# Altium PCB PCB1.pcbdoc
Units mil, origin at the board's own origin, x right, y up, seen from the top; angles counter-clockwise.
Board outline 3685 x 2685 mil, 2 copper layers (Top Layer, Bottom Layer), stack 62.2 mil thick; 26 components, 23 nets, 64 pads, 1 vias.
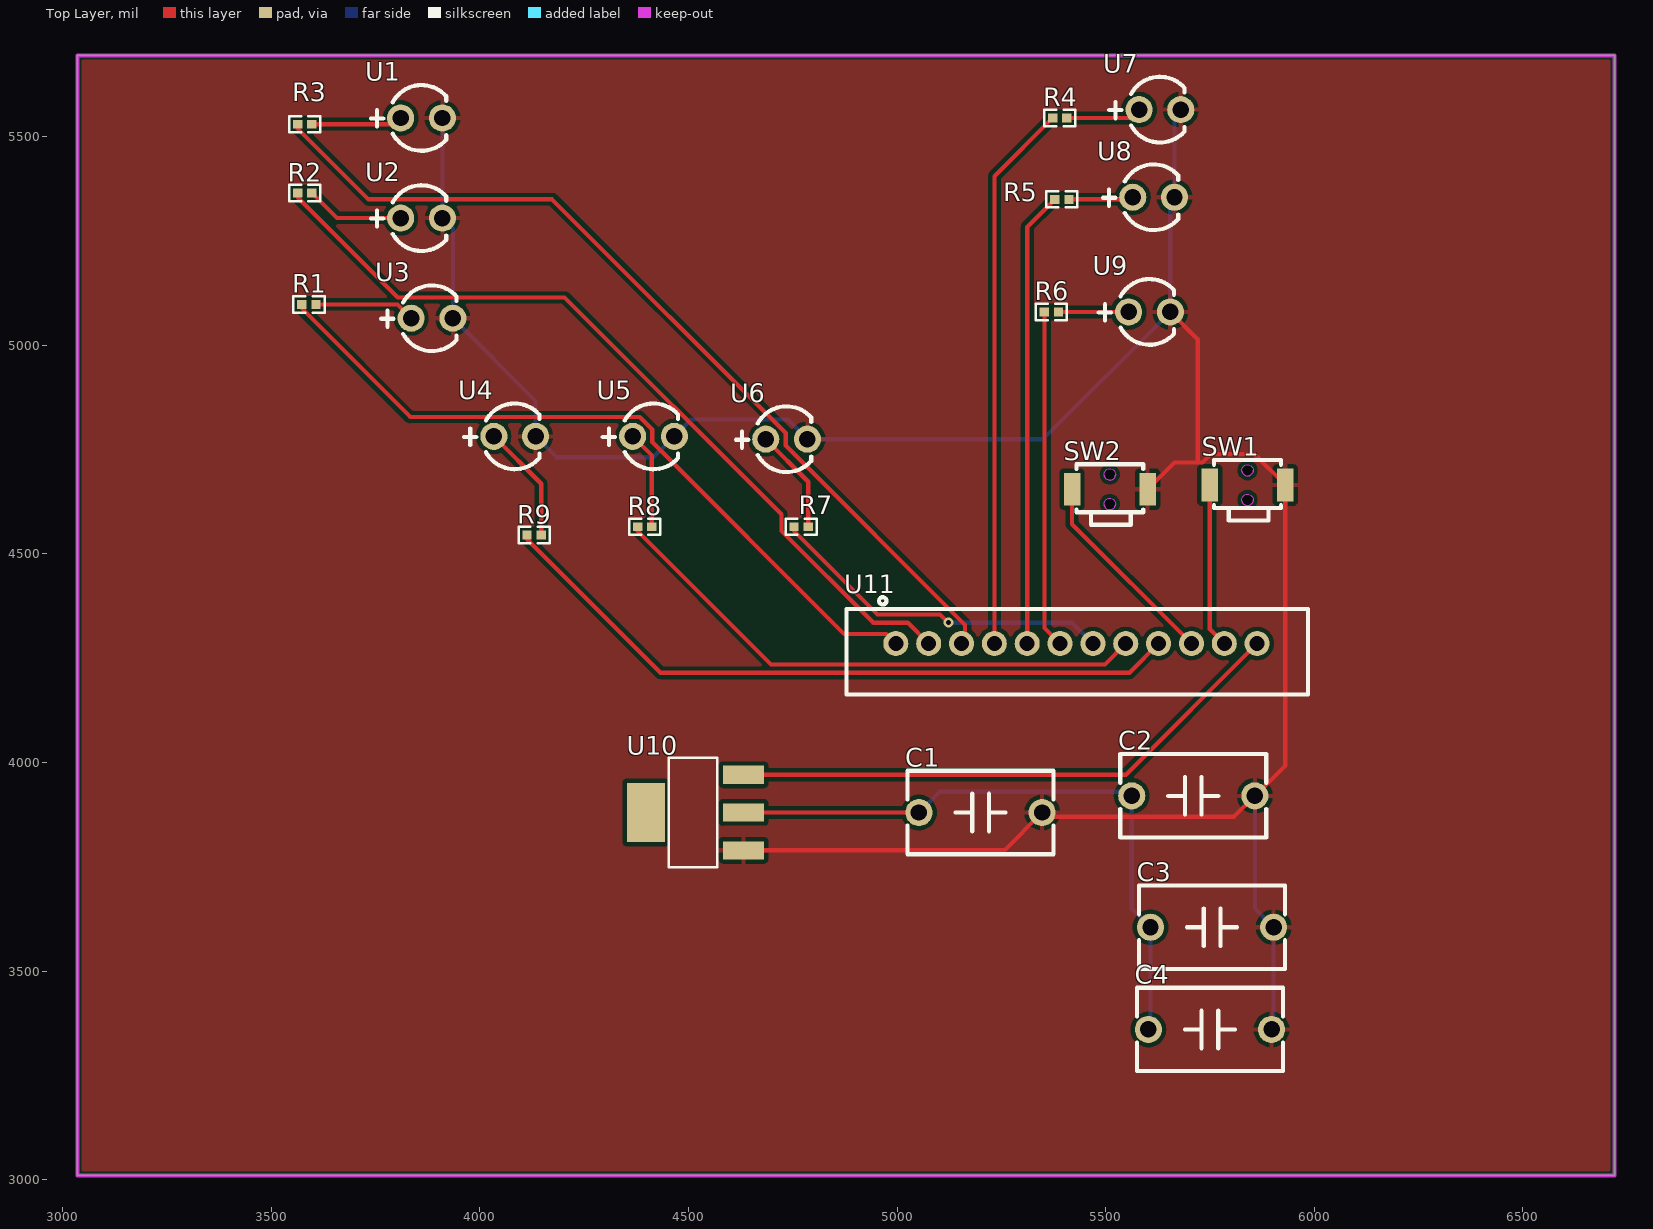
[diagram p0: Top Layer view]
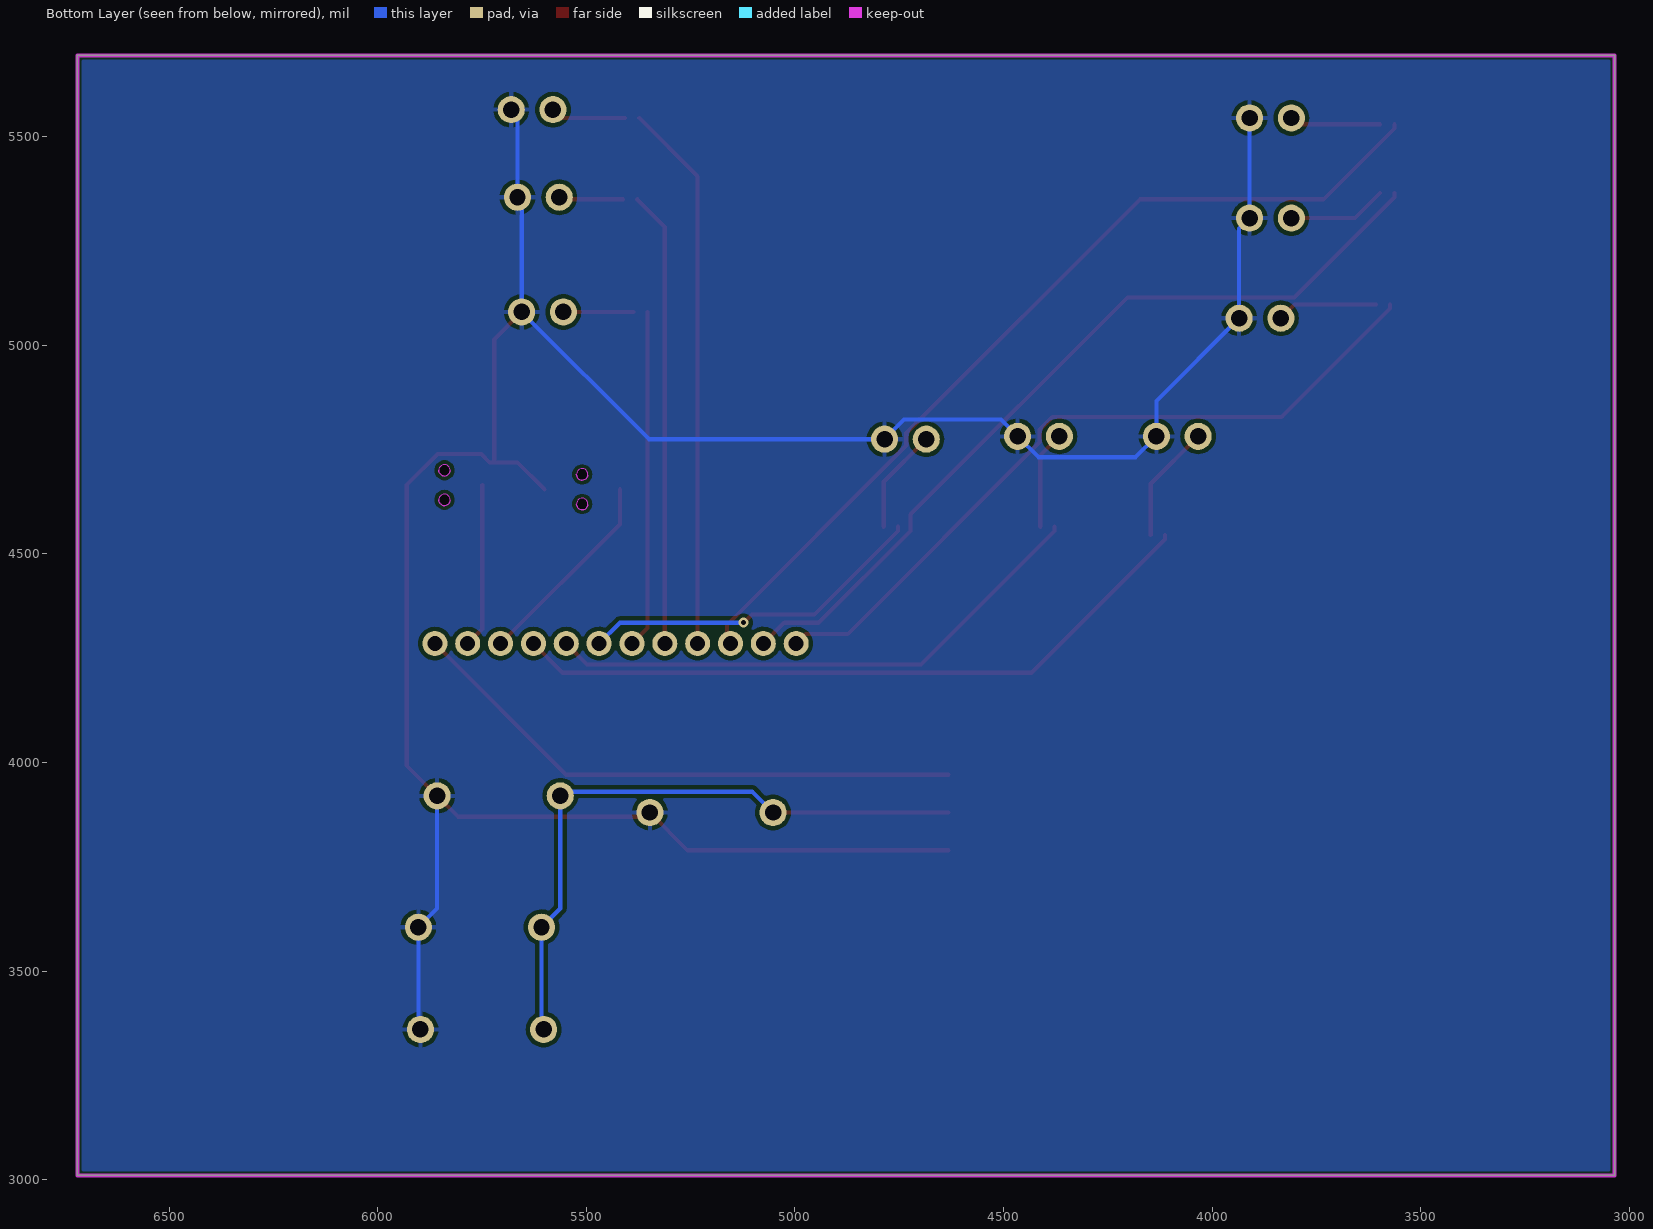
[diagram p1: Bottom Layer view, seen from below]

## Layer stack, top to bottom
Top Solder Mask Layer: solder mask 0.4, Dk 3.3
Top Layer: signal copper 1.4
Dielectric1: surface 59.4, FR4, Dk 4.5
Bottom Layer: signal copper 1.4
Bottom Solder Mask Layer: solder mask 0.4, Dk 3.3

## Board outline
3035,5695 3035,3010 6720,3010 6720,5695

## Design rules (kind name [scope] priority, off if disabled: settings)
BoardOutlineClearance copperThickness1oz_1 [All] p1: gap=10 ignorepadtopadclearanceinfootprint=FALSE except(0: Arc-SplitContinuation Track-SplitContinuation SMDPad-SplitContinuation THPad-SplitContinuation Via-SplitContinuation Fill-SplitContinuation Poly-SplitContinuation Region-SplitContinuation Text-SplitContinuation)
BoardOutlineClearance copperThickness2oz_1 [All] p2: gap=10 ignorepadtopadclearanceinfootprint=FALSE except(0: Arc-SplitContinuation Track-SplitContinuation SMDPad-SplitContinuation THPad-SplitContinuation Via-SplitContinuation Fill-SplitContinuation Poly-SplitContinuation Region-SplitContinuation Text-SplitContinuation)
BoardOutlineClearance otherClearance_1 [All] p3: gap=10 ignorepadtopadclearanceinfootprint=FALSE except(0: Arc-SplitContinuation Track-SplitContinuation SMDPad-SplitContinuation THPad-SplitContinuation Via-SplitContinuation Fill-SplitContinuation Poly-SplitContinuation Region-SplitContinuation Text-SplitContinuation)
Clearance copperThickness1oz [All] p1: gap=7 ignorepadtopadclearanceinfootprint=FALSE
Clearance copperThickness2oz [All] p2: gap=7 ignorepadtopadclearanceinfootprint=FALSE
Clearance otherClearance [All] p3: gap=7 ignorepadtopadclearanceinfootprint=FALSE
DiffPairsRouting differentialPair [All] p1: maxlimit=6 minlimit=6 mostfreqgap=6 toplayer_minwidth=5 toplayer_maxwidth=100 toplayer_prefwidth=10 bottomlayer_minwidth=5 bottomlayer_maxwidth=100 bottomlayer_prefwidth=10 maxuncoupledlength=10
PasteMaskExpansion pasteMaskExpansion [All] p1: expansion=0
PlaneConnect innerPlane [All] p1: planeconnectstyle=Relief reliefexpansion=20 reliefentries=4 reliefconductorwidth=10 reliefairgap=10
PolygonConnect copperRegion [All] p1: connectstyle=Relief reliefconductorwidth=10 reliefentries=4 polygonreliefangle="90 Angle" airgapwidth=10
RoutingVias viaSize [All] p1: holewidth=12.01 width=12.01 viastyle="Through Hole" minholewidth=11.81 minwidth=11.81 maxholewidth=248.03 maxwidth=248.03
SolderMaskExpansion solderMaskExpansion_1 [IsVia] p1: expansion=-1000 istentingtop=FALSE useseparateexpansions=TRUE expansionbottom=-1000 istentingbottom=FALSE
SolderMaskExpansion solderMaskExpansion [All] p2: expansion=2 istentingtop=FALSE useseparateexpansions=TRUE expansionbottom=2 istentingbottom=FALSE
Width copperThickness1oz_2 [All] p1: maxlimit=100 minlimit=5 preferedwidth=10
Width copperThickness2oz_2 [All] p2: maxlimit=100 minlimit=8 preferedwidth=10
27 further rules are at their usual default settings.

## Components (designator, comment, footprint, x,y, rotation, side; value= is the part's Value field where it differs from the comment)
C1 "100nF" CAP-TH_L9.0-W5.0-P7.50-D0.6-1 5200,3880 r0 top
C2 "100nF" CAP-TH_L9.0-W5.0-P7.50-D0.6-1 5710,3920 r0 top
C3 "100nF" CAP-TH_L9.0-W5.0-P7.50-D0.6-1 5755,3605 r0 top
C4 "100nF" CAP-TH_L9.0-W5.0-P7.50-D0.6-1 5750,3360 r0 top
R1 "330Ω" R0402#1 3590.2,5097.9 r0 top
R2 "330Ω" R0402#2 3580,5365 r0 top
R3 "330Ω" R0402#2 3580,5530 r0 top
R4 "330Ω" R0402#2 5390,5545 r0 top
R5 "330Ω" R0402#2 5395,5350 r0 top
R6 "330Ω" R0402#2 5370,5080 r0 top
R7 "330Ω" R0402#2 4770,4565 r0 top
R8 "330Ω" R0402#2 4395,4565 r0 top
R9 "330Ω" R0402#2 4130,4545 r0 top
SW1 "KEY_2S3mm*4mm-带定位柱" KEY-SMD_L4.0-W3.7-LS4.8 5840,4665 r0 top
SW2 "KEY_2S3mm*4mm-带定位柱" KEY-SMD_L4.0-W3.7-LS4.8 5510,4655 r0 top
U1 "LED" LED-TH_BD4.0-P2.54-FD_RED 3860,5545 r0 top
U2 "LED" LED-TH_BD4.0-P2.54-FD_RED 3860,5305 r0 top
U3 "LED" LED-TH_BD4.0-P2.54-FD_RED 3885,5065 r0 top
U4 "LED" LED-TH_BD4.0-P2.54-FD_RED 4083.3,4781.8 r0 top
U5 "LED" LED-TH_BD4.0-P2.54-FD_RED 4416.1,4781.8 r0 top
U6 "LED" LED-TH_BD4.0-P2.54-FD_RED 4735,4775 r0 top
U7 "LED" LED-TH_BD4.0-P2.54-FD_RED 5630,5565 r0 top
U8 "LED" LED-TH_BD4.0-P2.54-FD_RED 5615,5355 r0 top
U9 "LED" LED-TH_BD4.0-P2.54-FD_RED 5605,5080 r0 top
U10 "AMS1117-3.3" SOT-223-3_L6.5-W3.4-P2.30-LS7.0-BR 4515,3880 r0 top
U11 "HDR-1X12" CONN-TH_HDR-1X12 5430,4285 r0 top

## Footprints (in the part's own frame and the unit in brackets; to place one, negate y for a bottom-side part, rotate by r counter-clockwise, add the part's x,y. Pads: shape width x height; smd on the part's side, far side on the other; paste and mask are expansions set on the pad)
CAP-TH_L9.0-W5.0-P7.50-D0.6-1 [mil]
  round 65 hole 39.4 paste-99999 mask+2: 1(-147.6,0) 2(147.6,0)
  silkscreen extent -175,-100 175,100
CONN-TH_HDR-1X12 [mil]
  round 60 hole 36 paste-99999 mask+2: 1(-433.1,0) 2(-354.3,0) 3(-275.6,0) 4(-196.9,0) 5(-118.1,0) 6(-39.4,0) 7(39.4,0) 8(118.1,0) 9(196.8,0) 10(275.6,0) 11(354.3,0) 12(433.1,0)
  silkscreen extent -551,-122 555,111
KEY-SMD_L4.0-W3.7-LS4.8 [mil]
  rect 39.4x78.7 smd: 1(-90.6,0) 2(90.6,0)
  Board Outline Layer board cut-out: 13.8,-35.4 13.4,-38.6 12.3,-41.6 10.6,-44.3 8.2,-46.5 5.5,-48.1 2.4,-49 -0.8,-49.2 -4,-48.6 -6.9,-47.4 -9.5,-45.5 -11.5,-43 -12.9,-40.1 -13.7,-37 -13.7,-33.8 -12.9,-30.7 -11.5,-27.9 -9.5,-25.4 -6.9,-23.5 -4,-22.2 -0.8,-21.7 2.4,-21.9 5.5,-22.8 8.2,-24.4 10.6,-26.6 12.3,-29.2 13.4,-32.3 13.8,-35.4
  Board Outline Layer board cut-out: 13.8,35.4 13.4,32.3 12.3,29.2 10.6,26.6 8.2,24.4 5.5,22.8 2.4,21.9 -0.8,21.7 -4,22.2 -6.9,23.5 -9.5,25.4 -11.5,27.9 -12.9,30.7 -13.7,33.8 -13.7,37 -12.9,40.1 -11.5,43 -9.5,45.5 -6.9,47.4 -4,48.6 -0.8,49.2 2.4,49 5.5,48.1 8.2,46.5 10.6,44.3 12.3,41.6 13.4,38.6 13.8,35.4
  Board Outline Layer region: 13.8,-35.4 13.4,-38.6 12.3,-41.6 10.6,-44.3 8.2,-46.5 5.5,-48.1 2.4,-49 -0.8,-49.2 -4,-48.6 -6.9,-47.4 -9.5,-45.5 -11.5,-43 -12.9,-40.1 -13.7,-37 -13.7,-33.8 -12.9,-30.7 -11.5,-27.9 -9.5,-25.4 -6.9,-23.5 -4,-22.2 -0.8,-21.7 2.4,-21.9 5.5,-22.8 8.2,-24.4 10.6,-26.6 12.3,-29.2 13.4,-32.3 13.8,-35.4
  Board Outline Layer region: 13.8,-35.4 13.4,-38.6 12.3,-41.6 10.6,-44.3 8.2,-46.5 5.5,-48.1 2.4,-49 -0.8,-49.2 -4,-48.6 -6.9,-47.4 -9.5,-45.5 -11.5,-43 -12.9,-40.1 -13.7,-37 -13.7,-33.8 -12.9,-30.7 -11.5,-27.9 -9.5,-25.4 -6.9,-23.5 -4,-22.2 -0.8,-21.7 2.4,-21.9 5.5,-22.8 8.2,-24.4 10.6,-26.6 12.3,-29.2 13.4,-32.3 13.8,-35.4
  Board Outline Layer region: 13.8,35.4 13.4,32.3 12.3,29.2 10.6,26.6 8.2,24.4 5.5,22.8 2.4,21.9 -0.8,21.7 -4,22.2 -6.9,23.5 -9.5,25.4 -11.5,27.9 -12.9,30.7 -13.7,33.8 -13.7,37 -12.9,40.1 -11.5,43 -9.5,45.5 -6.9,47.4 -4,48.6 -0.8,49.2 2.4,49 5.5,48.1 8.2,46.5 10.6,44.3 12.3,41.6 13.4,38.6 13.8,35.4
  Board Outline Layer region: 13.8,35.4 13.4,32.3 12.3,29.2 10.6,26.6 8.2,24.4 5.5,22.8 2.4,21.9 -0.8,21.7 -4,22.2 -6.9,23.5 -9.5,25.4 -11.5,27.9 -12.9,30.7 -13.7,33.8 -13.7,37 -12.9,40.1 -11.5,43 -9.5,45.5 -6.9,47.4 -4,48.6 -0.8,49.2 2.4,49 5.5,48.1 8.2,46.5 10.6,44.3 12.3,41.6 13.4,38.6 13.8,35.4
  Board Outline Layer lines w0.1: -13.7,-37 -12.9,-40.1 -11.5,-43 -9.5,-45.5 -6.9,-47.4 -4,-48.6 -0.8,-49.2 2.4,-49 5.5,-48.1 8.2,-46.5 10.6,-44.3 12.3,-41.6 13.4,-38.6 13.8,-35.4 13.4,-32.3 12.3,-29.2 10.6,-26.6 8.2,-24.4 5.5,-22.8 2.4,-21.9 -0.8,-21.7 -4,-22.2 -6.9,-23.5 -9.5,-25.4 -11.5,-27.9 -12.9,-30.7 -13.7,-33.8 -13.7,-37 ; -13.7,33.8 -12.9,30.7 -11.5,27.9 -9.5,25.4 -6.9,23.5 -4,22.2 -0.8,21.7 2.4,21.9 5.5,22.8 8.2,24.4 10.6,26.6 12.3,29.2 13.4,32.3 13.8,35.4 13.4,38.6 12.3,41.6 10.6,44.3 8.2,46.5 5.5,48.1 2.4,49 -0.8,49.2 -4,48.6 -6.9,47.4 -9.5,45.5 -11.5,43 -12.9,40.1 -13.7,37 -13.7,33.8
  silkscreen extent -80,-85 80,60
LED-TH_BD4.0-P2.54-FD_RED [mil]
  round 65 hole 39.4: 1(-50,0) 2(50,0)
  silkscreen extent -122,-79 59,79
R0402#1 [mil]
  rect 22.3x21.3 smd paste-3937 mask+2: 1(-17.1,0) 2(17,0)
  silkscreen extent -37,-20 37,20
R0402#2 [mil]
  rect 22.3x21.3 smd paste-3937 mask+2: 1(-17,0) 2(17,0)
  silkscreen extent -37,-20 37,20
SOT-223-3_L6.5-W3.4-P2.30-LS7.0-BR [mil]
  rect 98.4x43.3 smd: 1(116.9,-90.6) 2(116.9,0) 3(116.9,90.6)
  rect 92.1x141.7 smd: 4(-116.9,0)
  silkscreen extent -62,-131 54,131

## Via types
v1: diameter 24, hole 12, Top Layer to Bottom Layer, 1 vias

## Nets (pads, with @x,y where several pads share a name; then routed paths per layer and width w, separated by ;. In a path a pad name is that pad's centre, name@x,y a point inside that pad or via, vN(x,y) a via of type N, cw(c..) or ccw(c..) an arc to the next point about the centre after c; other vN are vias at no path point)
3V3: C1.1 C2.1 C3.1 C4.1 U10.2 | length 1536.1
  Top Layer w10: U10.2 C1.1
  Bottom Layer w10: C1.1 5102.4,3930 5552.4,3930 C2.1 5562.4,3650 C3.1 5607.4,3365 C4.1
$1N18: R4.2 U7.1 | length 181.3
  Top Layer w10: R4.2 5560,5545 U7.1
$1N19: R5.2 U8.1 | length 155.1
  Top Layer w10: R5.2 5560,5350 U8.1
$1N20: R6.2 U9.1 | length 168
  Top Layer w10: R6.2 U9.1
$1N21: R7.2 U6.1 | length 252.2
  Top Layer w10: U6.1 4787,4673 R7.2
$1N22: R8.2 U5.1 | length 235.8
  Top Layer w10: U5.1 4412,4735.8 R8.2
$1N23: R9.2 U4.1 | length 283.9
  Top Layer w10: U4.1 4147,4668.1 R9.2
$1N24: R3.2 U1.1 | length 219.2
  Top Layer w10: R3.2 3795,5530 U1.1
$1N25: R2.2 U2.1 | length 237.9
  Top Layer w10: R2.2 3657,5305 U2.1
$1N26: R1.2 U3.1 | length 241.4
  Top Layer w10: R1.2 3802.1,5097.9 U3.1
BTN1: SW2.1 U11.10 | length 488.6
  Top Layer w10: SW2.1 5419.4,4571.1 U11.10
BTN2: SW1.1 U11.11 | length 394.4
  Top Layer w10: SW1.1@5749.5,4665 5749.5,4319.9 U11.11
GND: C1.2 C2.2 C3.2 C4.2 SW1.2 SW2.2 U1.2 U2.2 U3.2 U4.2 U5.2 U6.2 U7.2 U8.2 U9.2 U10.1 | length 6504.2
  Top Layer w10: U10.1 5257.1,3789.4 C1.2 5357.6,3870 5807.6,3870 C2.2 5930.6,3992.9 SW1.2 5856.2,4739.4 5751.8,4739.4 5731.8,4719.4 5720.6,4719.4 ; SW2.2@5600.5,4655 5664.9,4719.4 5720.6,4719.4 ; U9.2 5720.6,5014.5 5720.6,4719.4
  Bottom Layer w10: U1.2 U2.2 3935,5280 U3.2 4133.3,4866.7 U4.2 4183.3,4731.8 4416.1,4731.8 U5.2 4506.1,4821.8 4738.2,4821.8 U6.2 5350,4775 U9.2 5655,5345 U8.2 5665,5550 U7.2 ; C2.2 5857.6,3650 C3.2 5902.6,3365 C4.2
LED1: R1.1 U11.1 | length 1783.9
  Top Layer w10: R1.1 3573.1,5087.9 3833.1,4827.9 4383.1,4827.9 4413.1,4797.9 4413.1,4767.9 4873.1,4307.9 4974,4307.9 U11.1
LED2: R2.1 U11.2 | length 1989.3
  Top Layer w10: R2.1 3563,5355 3803,5115 4203,5115 4723,4595 4723,4555 4943,4335 5025.7,4335 U11.2
LED3: R3.1 U11.3 | length 2169.1
  Top Layer w10: R3.1 3563,5520 3733,5350 4173,5350 4733,4790 4733,4760 5163,4330 5163,4293.5 U11.3
LED4: R4.1 U11.4 | length 1318
  Top Layer w10: U11.4 5233.1,5405.2 R4.1
LED5: R5.1 U11.5 | length 1092.4
  Top Layer w10: U11.5 5311.9,5283.9 R5.1
LED6: R6.1 U11.6 | length 810.5
  Top Layer w10: R6.1 5353,4322.7 U11.6
LED7: R7.1 U11.7 | length 838.2
  Top Layer w10: R7.1 4753,4555 4953,4355 5103,4355 v1(5123,4335)
  Bottom Layer w10: v1(5123,4335) 5419.4,4335 U11.7
LED8: R8.1 U11.8 | length 1333.4
  Top Layer w10: R8.1 4378,4555 4698,4235 5498.1,4235 U11.8
LED9: R9.1 U11.9 | length 1685.4
  Top Layer w10: R9.1 4113,4535 4433,4215 5556.9,4215 U11.9
VCC: U10.3 U11.12 | length 1361.4
  Top Layer w10: U10.3 5548.6,3970.6 U11.12
pads on no net: U10.4

## Polygon pours and split planes (outlines as drawn)
GND on Top Layer "Top Layer-GND" (solid, remove dead copper, pour order 0): 3000,5745 3000,3000 6750,3000 6750,5745
GND on Bottom Layer "Bottom Layer-GND" (solid, remove dead copper, pour order 2): 3035,5695 3035,3000 6725,3000 6725,5695

## Keep-outs
Board Outline Layer:
  the board outline again, w10